# Altium PCB Seets_controller.PcbDoc
Units mm, origin at the board's own origin, x right, y up, seen from the top; angles counter-clockwise.
Board outline 152.4 x 101.6 mm, 2 copper layers (Top Layer, Bottom Layer); 41 components, 33 nets, 143 pads, 32 vias.
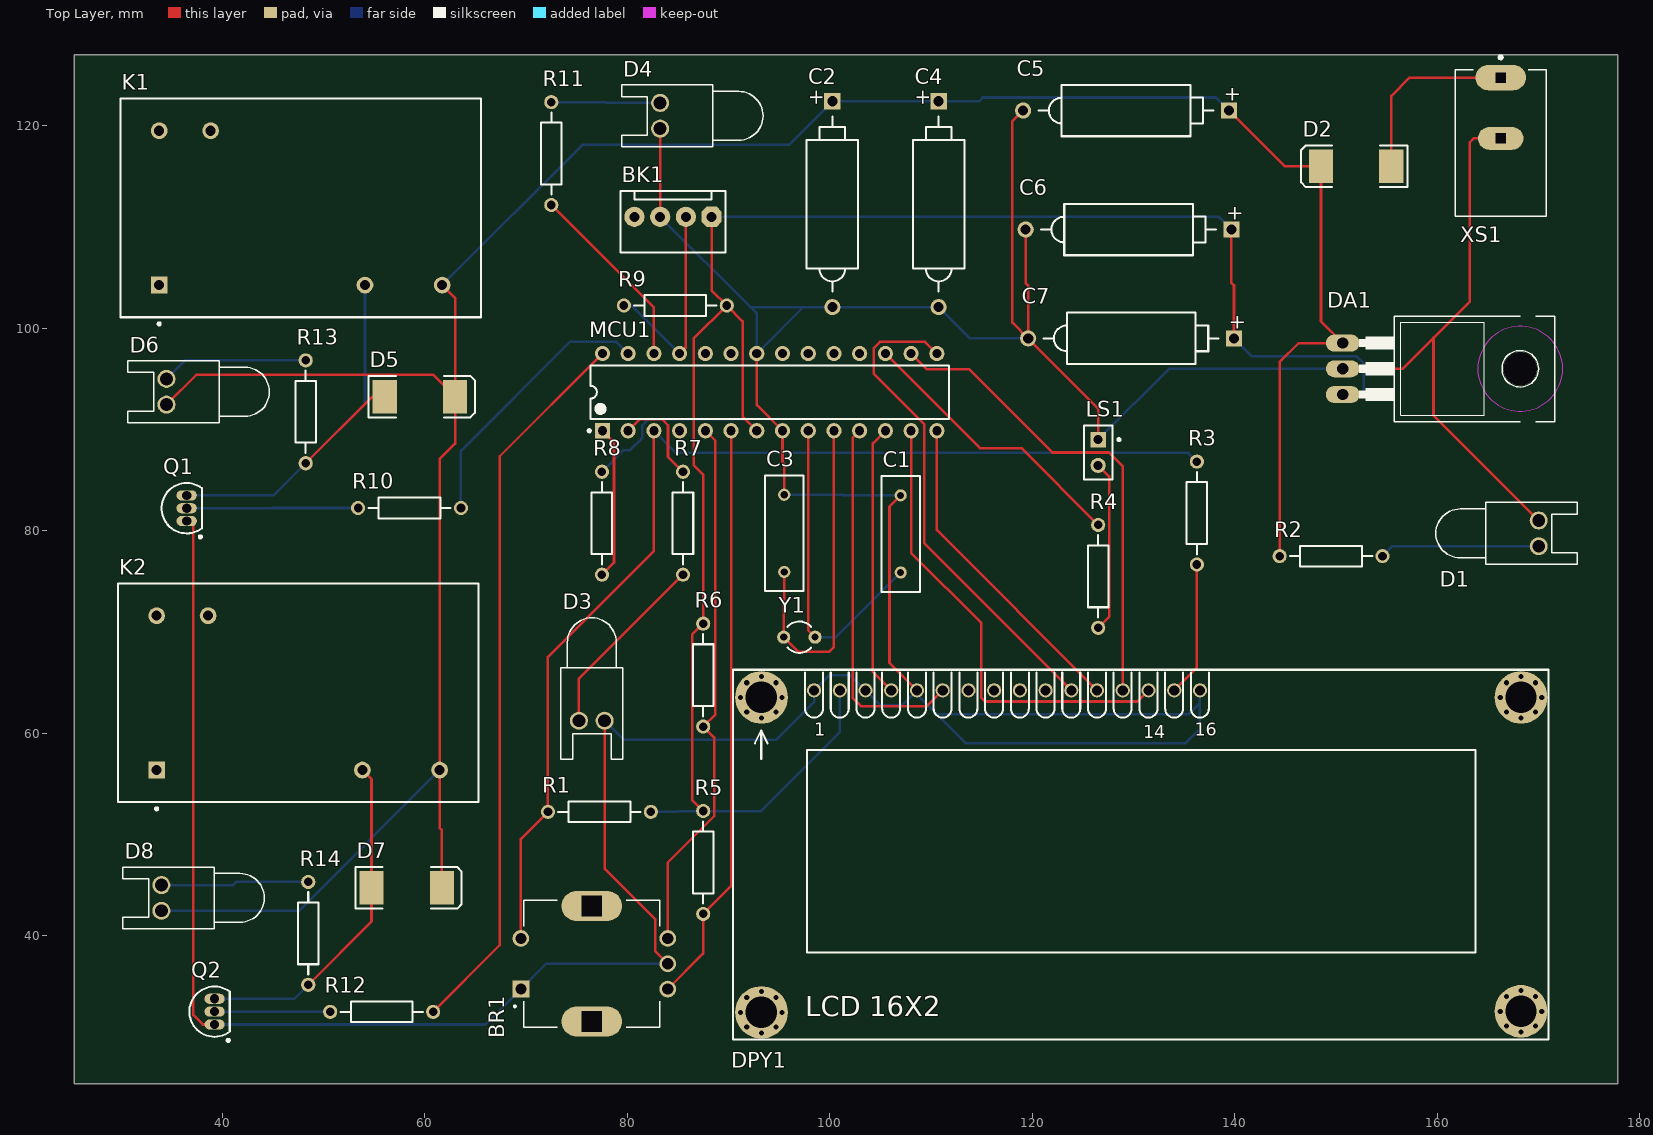
[diagram p0: Top Layer view]
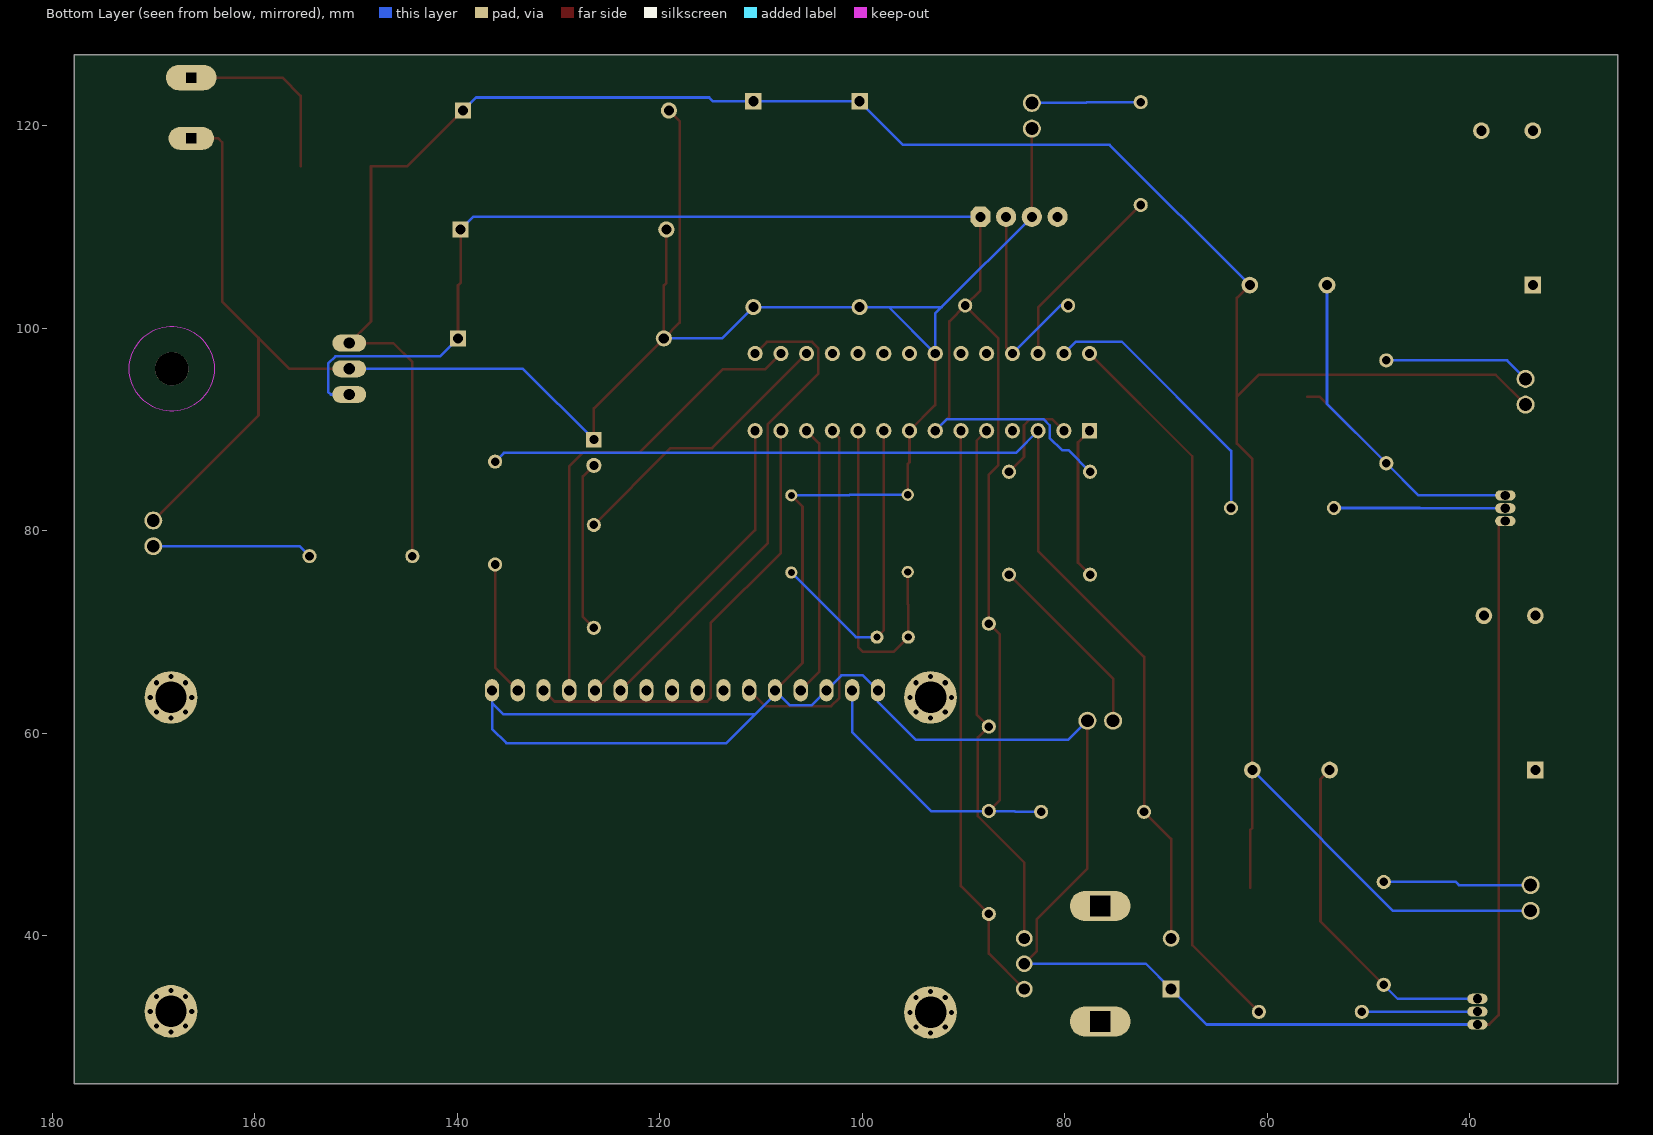
[diagram p1: Bottom Layer view, seen from below]

## Layer stack, top to bottom
Top Solder: solder mask 0.0102, Solder Resist, Dk 3.5
Top Layer: signal copper 0.0356
Dielectric 1: dielectric 0.32, FR-4, Dk 4.8
Bottom Layer: signal copper 0.0356
Bottom Solder: solder mask 0.0102, Solder Resist, Dk 3.5

## Board outline
25.4,25.4 177.8,25.4 177.8,127 25.4,127

## Design rules (kind name [scope] priority, off if disabled: settings)
Clearance [All] p1: gap=0.254 ignorepadtopadclearanceinfootprint=FALSE except(0: Arc-Hole Track-Hole SMDPad-Hole THPad-Hole Via-Hole Fill-Hole Poly-Hole Region-Hole Text-Hole)
PolygonConnect [All] p1: connectstyle=Relief reliefconductorwidth=0.254 reliefentries=4 polygonreliefangle="90 Angle" airgapwidth=0.254
RoutingVias [All] p1: holewidth=0.711 width=1.27 viastyle="Through Hole" minholewidth=0.711 minwidth=1.27 maxholewidth=0.711 maxwidth=1.27
SolderMaskExpansion [All] p1: expansion=0.102
Width [All] p1: maxlimit=0.254 minlimit=0.254 preferedwidth=0.254
30 further rules are at their usual default settings.

## Components (designator, comment, footprint, x,y, rotation, side; value= is the part's Value field where it differs from the comment)
BK1 "" WF_4 84.52,111 r180 top
BR1 "PEC11R-4215F-S0024" XDCR_PEC11R-4215F-S0024 76.5,37.25 r90 top
C1 "" RAD-0.3 107,79.69 r270 top
C2 "" POLAR0.8 100.25,112.25 r90 top
C3 "" RAD-0.3 95.5,79.75 r270 top
C4 "" POLAR0.8 110.75,112.25 r90 top
C5 "" POLAR0.8 129.25,121.5 r0 top
C6 "" POLAR0.8 129.5,109.75 r0 top
C7 "" POLAR0.8 129.75,99 r0 top
D1 "" LED-0 170,79.75 r270 top
D2 "" SMC 151.975,116 r180 top
D3 "" LED-0 76.5,61.25 r180 top
D4 "" LED-0 83.25,120.98 r90 top
D5 "" SMC 59.525,93.25 r0 top
D6 "" LED-0 34.5,93.73 r90 top
D7 "" SMC 58.225,44.75 r0 top
D8 "" LED-0 34,43.75 r90 top
DA1 "" TO220 157,96 r270 top
DPY1 "" LCDCHAR_16X2_BLU 130.75,48 r0 top
K1 "" MODULE5B 47.752,111.887 r0 top
K2 "" MODULE5B 47.5,64 r0 top
LS1 "" PIN2 126.5,89 r270 top
MCU1 "ATmega8-16PU" 28P3 94.06,93.69 r90 top
Q1 "" TO-92A 36.5,82.23 r0 top
Q2 "" TO-92A 39.25,32.52 r0 top
R1 "" AXIAL-0.4 77.25,52.25 r180 top
R2 "" AXIAL-0.4 149.5,77.5 r0 top
R3 "" AXIAL-0.4 136.25,81.75 r90 top
R4 "" AXIAL-0.4 126.5,75.5 r90 top
R5 "" AXIAL-0.4 87.5,47.25 r90 top
R6 "" AXIAL-0.4 87.5,65.75 r90 top
R7 "" AXIAL-0.4 85.5,80.75 r270 top
R8 "" AXIAL-0.4 77.5,80.75 r90 top
R9 "" AXIAL-0.4 84.75,102.25 r0 top
R10 "" AXIAL-0.4 58.5,82.25 r0 top
R11 "" AXIAL-0.4 72.5,117.25 r90 top
R12 "" AXIAL-0.4 55.75,32.5 r0 top
R13 "" AXIAL-0.4 48.25,91.75 r90 top
R14 "" AXIAL-0.4 48.5,40.25 r90 top
XS1 "Power_connector" CUI_PJ-037AH 166.25,124.75 r270 top
Y1 "" R38 97,69.5 r270 top

## Footprints (in the part's own frame and the unit in brackets; to place one, negate y for a bottom-side part, rotate by r counter-clockwise, add the part's x,y. Pads: shape width x height; smd on the part's side, far side on the other; paste and mask are expansions set on the pad)
28P3 [mm] "DIP, 28-Leads, Row Spacing 7.62mm, Pitch 2.54mm, Body 34.67x7.3mm"
  rect 1.5x1.5 hole 0.9: 1(-3.81,16.51)
  round 1.5 hole 0.9: 2(-3.81,13.97) 3(-3.81,11.43) 4(-3.81,8.89) 5(-3.81,6.35) 6(-3.81,3.81) 7(-3.81,1.27) 8(-3.81,-1.27) 9(-3.81,-3.81) 10(-3.81,-6.35) 11(-3.81,-8.89) 12(-3.81,-11.43) 13(-3.81,-13.97) 14(-3.81,-16.51) 15(3.81,-16.51) 16(3.81,-13.97) 17(3.81,-11.43) 18(3.81,-8.89) 19(3.81,-6.35) 20(3.81,-3.81) 21(3.81,-1.27) 22(3.81,1.27) 23(3.81,3.81) 24(3.81,6.35) 25(3.81,8.89) 26(3.81,11.43) 27(3.81,13.97) 28(3.81,16.51)
  silkscreen extent -3.93,-17.7 2.65,17.93, body extent -3.6,-17.65 3.6,17.65, height 4.58
AXIAL-0.4 [mm] "Axial Device, Thru-Hole; 2 Leads; 0.4 in Pin Spacing"
  round 1.4 hole 0.85: 1(-5.08,0) 2(5.08,0)
  silkscreen extent -4.06,-1.02 4.06,1.02
CUI_PJ-037AH [mm]
  oval 2.5x5 hole 1 square: 1(0,0)
  oval 2.25x4.5 hole 1 square: 2(6,0)
  silkscreen extent -2.15,-4.5 13.7,4.5, body extent -0.8,-4.5 13.7,4.5, height 11
LCDCHAR_16X2_BLU [mm] "LCD Characters Display, 2linesX16char, Blue, header1x16"
  round 1.4 / inner round 1.4 / far side oval 1.4x2.2 hole 1: 1(-32.3,16.25) 2(-29.76,16.25) 3(-27.22,16.25) 4(-24.68,16.25) 5(-22.14,16.25) 6(-19.6,16.25) 7(-17.06,16.25) 8(-14.52,16.25) 9(-11.98,16.25) 10(-9.44,16.25) 11(-6.9,16.25) 12(-4.36,16.25) 13(-1.82,16.25) 14(0.72,16.25) 15(3.26,16.25) 16(5.8,16.25)
  round 5.2 hole 3.1: MH1(-37.5,15.55) MH2(-37.5,-15.55) MH3(37.5,-15.45) MH4(37.5,15.55)
  silkscreen extent -40.29,-18.22 40.21,18.28, body extent -40,-18 40,18, height 24.8
LED-0 [mil] "LED; 2 Leads"
  round 70 hole 50: 1(50,0) 2(-50,0)
  silkscreen extent -120,-400 120,150
MODULE5B [mm] "DIP; 5 Round Pins; Row Space 15.24 mm; Pitch 2.54 mm"
  rect 1.65x1.65 hole 1: 1(-13.97,-7.62)
  round 1.65 hole 1: 2(-13.97,7.62) 3(-8.89,7.62) 4(13.97,-7.62) 5(6.35,-7.62)
  silkscreen extent -17.8,-11.57 17.8,10.8, body extent -17.8,-10.8 17.8,10.8, height 14
PIN2 [mm] "Photosensitive Diode; 2 Leads"
  rect 1.5x1.5 hole 0.9: 1(0,0)
  round 1.5 hole 0.9: 2(2.54,0)
  silkscreen extent -1.4,-1.4 3.94,2.18
POLAR0.8 [mm] "Polarized Capacitor; 2 Leads"
  rect 1.6x1.6 hole 1: 1(10.16,0)
  round 1.6 hole 1: 2(-10.16,0)
  silkscreen extent -8.64,-2.54 8.64,2.54
R38 [mm] "Crystal, Thru-Hole; 2 Leads; Body 3.1 x 8.2 mm (Dia.xH)"
  round 1.3 hole 0.7: 1(0,1.55) 2(0,-1.55)
  silkscreen extent -1.55,-1.19 1.55,1.17
RAD-0.3 [mm] "Radial Cap, Thru-Hole; 2 Leads; 0.3 in Pin Spacing"
  round 1.2 hole 0.7: 1(-3.81,0) 2(3.81,0)
  silkscreen extent -5.72,-1.9 5.71,1.91
SMC [mm] "DO-214-AB/SMC; 2 C-Bend Leads; Body 7.9 x 5.9 mm, inc. leads (LxW)"
  rect 2.4x3.3 smd: 1(-3.475,0) 2(3.475,0)
  silkscreen extent -5.07,-2.05 5.43,2.05
TO220 [mil]
  oval 66x132 hole 44: 1(-100,-250) 2(0,-250) 3(100,-250)
  round 130 hole 130 unplated: ""(0,440)
  Keep-Out Layer circle w0: c0,440 r165
  Keep-Out Layer circle w0: c0,440 r165
  silkscreen extent -205,-185 205,575
TO-92A [mm] "TO, Flat Index; 3 In-Line, Axial Leads; Body Dia. 4.5mm; Leads 0.51 x 0.48 mm (max)"
  oval 2x1 hole 0.9: 1(0,-1.27) 2(0,0) 3(0,1.27)
  silkscreen extent -2.48,-2.95 1.5,2.48, body extent -2.48,-2.5 1.5,2.5, height 6.86
WF_4 [mm] "DS1070  WF, Cvilux CI31 pitch 2.54mm"
  oct 2x2 hole 1: 1(-3.81,0)
  round 2 hole 1: 2(-1.27,0) 3(1.27,0) 4(3.81,0)
  silkscreen extent -5.2,-2.55 5.2,3.5, body extent -5.08,-2.4 5.08,3.4, height 11.56
XDCR_PEC11R-4215F-S0024 [mm]
  rect 1.65x1.65 hole 1.1: 1(-2.5,7)
  round 1.65 hole 1.1: 2(2.5,7) A(-2.5,-7.5) B(2.5,-7.5) COM(0,-7.5)
  oval 3x6 hole 2 square: S1(-5.7,0) S2(5.7,0)
  silkscreen extent -6.25,-6.7 6.25,7.7

## Part data
BK1: library part HUM_AM2301, "Sensor, Humidity+Temp, Digital, Capacitive", PARAM2=PARAM2
BR1: "Incremental Encoder, 12 Mm, Contact Rating 10 Ma - 5 Vdc", Package=None, Availability=Unavailable, MP=PEC11R-4215F-S0024, PRICE=None
C1 C3: library part Cap, "Capacitor", LatestRevisionDate=17-Jul-2002, LatestRevisionNote="Re-released for DXP Platform.", PackageDescription="Radial Cap, Thru-Hole; 2 Leads; 0.3 in Pin Spacing", PackageReference=RAD-0.3, Published=8-Jun-2000, Publisher="Altium Limited"
C2 C4 C5 C6 C7: library part "Cap Pol2", "Polarized Capacitor (Axial)", LatestRevisionDate=17-Jul-2002, LatestRevisionNote="Re-released for DXP Platform.", PackageDescription="Polarized Capacitor; 2 Leads", PackageReference=POLAR0.8, Published=8-Jun-2000, Publisher="Altium Limited"
D1 D3 D4 D6 D8: library part LED0, "Typical INFRARED GaAs LED", LatestRevisionDate=08-Jul-2005, LatestRevisionNote="Mech Layer 1 removed.", PackageDescription="LED; 2 Leads", PackageReference=LED-0, Published=8-Jun-2000, Publisher="Altium Limited"
D2 D5 D7: library part Diode, "Default Diode", Code_JEDEC=DO-214-AB, LatestRevisionDate=17-Jul-2002, LatestRevisionNote="Re-released for DXP Platform.", PackageDescription="DO-214-AB/SMC; 2 C-Bend Leads; Body 7.9 x 5.9 mm, inc. leads (LxW)", PackageReference=SMC, PackageVersion=Sep-1996, Published=8-Jun-2000, Publisher="Altium Limited"
DA1: library part LM7805, "IC REG LIN 5V 1A"
DPY1: library part LCDCHAR_16X2_BLU, "LCD Character Disp, 16X2", MANF=Newhaven, MANF_P#=NHD-0216K3Z-NSW-BBW-V3, PARAM="2 lines x 16 characters", PARAM2="Blue back, White, 5V"
K1 K2: library part Relay-SPDT, "Single-Pole Dual-Throw Relay", LatestRevisionDate=17-Jul-2002, LatestRevisionNote="Re-released for DXP Platform.", PackageReference=MODULE5B, Published=24-Mar-1999, Publisher="Altium Limited"
LS1: library part Speaker, "Loudspeaker", LatestRevisionDate=17-Jul-2002, LatestRevisionNote="Re-released for DXP Platform.", PackageReference=PIN2, Published=24-Mar-1999, Publisher="Altium Limited"
MCU1: library part CMP-0095-00372-1, "8-bit AVR Microcontroller, 4.5-5.5V, 16MHz, 8KB Flash, 512 Bytes EEPROM, 1KB SRAM, 28-pin PDIP, Industrial Grade (-40癈 to 85癈)", ComponentLink1Description="Manufacturer URL", ComponentLink1URL=http://www.atmel.com/, ComponentLink2Description=ATmega8(L), ComponentLink2URL=http://www.atmel.com/dyn/resources/prod_documents/doc2486.pdf, ComponentLink3Description="ATmega8(L) Summary", ComponentLink3URL=http://www.atmel.com/dyn/resources/prod_documents/2486S.pdf, DatasheetVersion="revZ, Feb-2011", PackageDescription="28-lead (0.300\"/7.62mm Wide) Plastic Dual Inline Package (PDIP)", PackageReference=28P3, PackageVersion="revB, Sep-2001"
Q1 Q2: library part 2N3904, "NPN General Purpose Amplifier", ComponentLink1Description="Manufacturer Link", ComponentLink1URL=http://www.fairchildsemi.com/, ComponentLink2Description=Datasheet, ComponentLink2URL=http://www.fairchildsemi.com/ds/2N%2F2N3904.pdf, DatasheetVersion=1997, LatestRevisionDate=15-Jan-2003, LatestRevisionNote="PCB Footprint 'BCY-W3/D4.7' replaced", PackageDescription="TO, Flat Index; 3 In-Line, Axial Leads; Body Dia. 4.5mm; Leads 0.51 x 0.48 mm (max)", PackageReference=TO-92A, PackageVersion=Sep-1998, Published=8-Jun-2000, Publisher="Altium Limited"
R1 R2 R3 R4 R5 R6 R7 R8 R9 R10 R11 R12 R13 R14: library part Res2, "Resistor", LatestRevisionDate=17-Jul-2002, LatestRevisionNote="Re-released for DXP Platform.", PackageDescription="Axial Device, Thru-Hole; 2 Leads; 0.4 in Pin Spacing", PackageReference=AXIAL-0.4, Published=8-Jun-2000, Publisher="Altium Limited"
Y1: library part XTAL, "Crystal Oscillator", LatestRevisionDate=17-Jul-2002, LatestRevisionNote="Re-released for DXP Platform.", PackageDescription="Crystal, Thru-Hole; 2 Leads; Body 3.1 x 8.2 mm (Dia.xH)", PackageReference=R38, Published=8-Jun-2000, Publisher="Altium Limited"

## Via types
v1: diameter 1, hole 0.5, Top Layer to Bottom Layer, 32 vias

## Nets (pads, with @x,y where several pads share a name; then routed paths per layer and width w, separated by ;. In a path a pad name is that pad's centre, name@x,y a point inside that pad or via, vN(x,y) a via of type N, cw(c..) or ccw(c..) an arc to the next point about the centre after c; other vN are vias at no path point)
+5: BK1.1 C6.1 C7.1 DA1.3 DPY1.2 MCU1.7 R1.1 R5.2 R6.2 R8.2 R9.2 | length 201.8
  Top Layer w0.254: R5.2 86.411,53.419 86.411,69.741 R6.2 87.5,85.55 86.563,86.487 86.563,98.983 R9.2 ; BK1.1 88.33,103.75 R9.2 ; MCU1.7 91.389,91.281 91.389,100.691 R9.2 ; C6.1 139.66,104.492 139.91,104.242 C7.1
  Bottom Layer w0.254: R8.2 79.63,87.96 80.264,87.96 81.483,89.179 81.483,90.424 82.093,91.034 91.636,91.034 MCU1.7 ; R1.1 84.861,52.25 84.941,52.33 R5.2 93.199,52.33 100.99,60.121 DPY1.2 ; BK1.1 138.41,111 C6.1 ; C7.1 141.679,97.231 152.019,97.231 152.73,96.52 152.73,93.726 152.464,93.46 DA1.3
+12: C2.1 C4.1 C5.1 D2.2 D5.2 D6.2 D7.2 D8.2 DA1.1 K1.4 K2.4 R2.1 | length 266.4
  Top Layer w0.254: D6.2 37.442,95.402 60.848,95.402 D5.2 ; D7.2 61.7,50.444 61.47,50.674 K2.4 61.47,87.091 63,88.621 D5.2 ; K1.4 63,102.989 D5.2 ; C5.1 144.91,116 D2.2 148.5,100.69 DA1.1 146.304,98.54 144.42,96.656 R2.1
  Bottom Layer w0.254: D8.2 47.57,42.48 K2.4 ; K1.4 75.565,118.11 95.95,118.11 C2.1 C4.1 114.732,122.41 115.105,122.784 138.126,122.784 C5.1
+12V: D2.1 XS1.1 | length 18.5
  Top Layer w0.254: D2.1 155.45,122.936 157.264,124.75 XS1.1
Anod: DPY1.15 R3.1 | length 13.3
  Top Layer w0.254: DPY1.15 136.25,66.49 R3.1
D7: DPY1.14 MCU1.13 | length 46.4
  Top Layer w0.254: MCU1.13 108.03,77.822 114.96,70.891 114.96,63.5 115.316,63.144 130.364,63.144 DPY1.14
E: DPY1.6 MCU1.11 | length 36.6
  Top Layer w0.254: MCU1.11 102.25,89.18 102.25,63.5 103.063,62.687 109.587,62.687 DPY1.6
GND: BK1.3 BR1.1 BR1.COM C1.1 C2.2 C3.1 C4.2 C5.2 C6.2 C7.2 D1.2 D3.2 D4.2 DA1.2 DPY1.1 DPY1.3 DPY1.5 DPY1.16 LS1.1 MCU1.8 MCU1.22 Q1.1 Q2.1 XS1.2 | length 463.4
  Top Layer w0.254: Q1.1 37.16,80.96 37.16,32.19 38.1,31.25 Q2.1 ; D3.2 77.77,46.639 82.779,41.631 82.779,38.471 BR1.COM ; BK1.3 D4.2 ; MCU1.22 92.79,92.42 MCU1.8 95.33,86.784 95.5,86.614 C3.1 ; C1.1 105.893,82.393 105.893,66.967 DPY1.5 ; C5.2 118.034,120.444 118.034,100.556 C7.2 ; C6.2 119.34,104.492 119.59,104.242 C7.2 ; LS1.1 126.5,92.09 C7.2 ; DA1.2 156.566,96 159.614,99.048 ; XS1.2 163.576,118.75 163.195,118.369 163.195,102.629 159.614,99.048 ; D1.2 159.614,91.406 159.614,99.048
  Bottom Layer w0.254: Q2.1 66,31.25 BR1.1 72,37.25 BR1.COM ; D3.2 79.66,59.36 94.691,59.36 98.45,63.119 DPY1.1 99.935,65.735 102.045,65.735 DPY1.3 105.017,62.763 107.123,62.763 DPY1.5 108.61,63.83 110.567,61.874 ; BK1.3 92.16,102.09 ; C3.1 101.219,83.56 101.279,83.5 C1.1 ; C7.2 113.84,99 C4.2 C2.2 97.38,102.09 ; LS1.1 133.5,96 DA1.2 ; DPY1.16 136.55,62.992 ; 92.16,102.09 97.38,102.09 ; 92.16,102.09 92.79,101.46 MCU1.22 97.38,102.09 ; 110.567,61.874 113.411,59.03 135.128,59.03 136.55,60.452 136.55,62.992 ; 110.567,61.874 135.432,61.874 136.55,62.992
NetBK1_2: BK1.2 MCU1.25 R9.1 | length 21.2
  Top Layer w0.254: MCU1.25 85.79,98.12 BK1.2
  Bottom Layer w0.254: R9.1 80.42,102.25 MCU1.25
NetBR1_2: BR1.2 MCU1.3 R1.2 R3.2 | length 110.5
  Top Layer w0.254: BR1.2 69.5,49.58 R1.2 72.17,67.547 82.63,78.007 MCU1.3
  Bottom Layer w0.254: MCU1.3 84.804,87.706 135.374,87.706 R3.2
NetBR1_A: BR1.A MCU1.6 R5.1 | length 57.7
  Top Layer w0.254: BR1.A 87.5,38.25 R5.1 90.25,44.92 MCU1.6
NetBR1_B: BR1.B MCU1.5 R6.1 | length 53.4
  Top Layer w0.254: BR1.B 84,47.235 88.581,51.816 88.581,59.589 R6.1 88.697,61.867 88.697,88.893 MCU1.5
NetC1_2: C1.2 MCU1.9 Y1.1 | length 31.8
  Top Layer w0.254: MCU1.9 97.87,70.18 Y1.1
  Bottom Layer w0.254: Y1.1 100.62,69.5 C1.2
NetC3_2: C3.2 MCU1.10 Y1.2 | length 33.6
  Top Layer w0.254: C3.2 95.5,72.745 95.45,72.695 Y1.2 96.903,68.047 99.924,68.047 100.41,68.533 MCU1.10
NetD1_1: D1.1 R2.2 | length 15.8
  Bottom Layer w0.254: R2.2 155.56,78.48 D1.1
NetD3_1: D3.1 R7.2 | length 18.7
  Top Layer w0.254: D3.1 75.23,65.4 R7.2
NetD4_1: D4.1 R11.2 | length 10.8
  Bottom Layer w0.254: R11.2 77.826,122.33 77.906,122.25 D4.1
NetD5_1: D5.1 K1.5 Q1.3 R13.1 | length 43.6
  Top Layer w0.254: R13.1 54.83,93.25 D5.1
  Bottom Layer w0.254: Q1.3 45.08,83.5 R13.1 54.102,92.522 K1.5
NetD6_1: D6.1 R13.2 | length 14.5
  Bottom Layer w0.254: D6.1 36.33,96.83 R13.2
NetD7_1: D7.1 K2.5 Q2.3 R14.1 | length 34
  Top Layer w0.254: R14.1 54.75,41.42 D7.1 54.75,55.48 K2.5
  Bottom Layer w0.254: Q2.3 47.12,33.79 R14.1
NetD8_1: D8.1 R14.2 | length 14.6
  Bottom Layer w0.254: D8.1 41.072,45.02 41.382,45.33 R14.2
NetDPY1_11: DPY1.11 MCU1.15 | length 48.8
  Top Layer w0.254: MCU1.15 109.416,98.654 104.953,98.654 104.343,98.044 104.343,95.504 109.322,90.526 109.322,78.778 DPY1.11
NetDPY1_12: DPY1.12 MCU1.14 | length 32.2
  Top Layer w0.254: MCU1.14 110.57,80.07 DPY1.12
NetDPY1_13: DPY1.13 MCU1.16 | length 47.6
  Top Layer w0.254: MCU1.16 109.569,95.961 113.741,95.961 121.971,87.732 127.558,87.732 128.93,86.36 DPY1.13
NetLS1_2: LS1.2 R4.1 | length 16.9
  Top Layer w0.254: R4.1 127.584,71.504 127.584,85.376 LS1.2
NetMCU1_1: MCU1.1 R8.1 | length 15.2
  Top Layer w0.254: R8.1 78.689,76.859 78.689,88.741 MCU1.1
NetMCU1_2: MCU1.2 R7.1 | length 9.9
  Top Layer w0.254: MCU1.2 81.244,91.034 83.414,91.034 84.023,90.424 84.023,87.307 R7.1
NetMCU1_17: MCU1.17 R4.2 | length 28
  Top Layer w0.254: MCU1.17 114.818,88.172 118.908,88.172 R4.2
NetMCU1_26: MCU1.26 R11.1 | length 18.9
  Top Layer w0.254: R11.1 82.63,102.04 MCU1.26
NetMCU1_27: MCU1.27 R10.2 | length 27.1
  Bottom Layer w0.254: R10.2 63.58,87.888 74.371,98.679 78.911,98.679 MCU1.27
NetMCU1_28: MCU1.28 R12.2 | length 71.9
  Top Layer w0.254: R12.2 67.412,39.082 67.412,87.362 MCU1.28
NetQ1_2: Q1.2 R10.1 | length 16.9
  Bottom Layer w0.254: Q1.2 44.933,82.23 44.953,82.25 R10.1
NetQ2_2: Q2.2 R12.1 | length 11.4
  Bottom Layer w0.254: Q2.2 44.933,32.52 44.953,32.5 R12.1
RS: DPY1.4 MCU1.12 | length 26.9
  Top Layer w0.254: MCU1.12 104.25,88.64 104.25,66.07 DPY1.4
pads on no net: BK1.4 BR1.S1 BR1.S2 DA1. DPY1.7 DPY1.8 DPY1.9 DPY1.10 DPY1.MH1 DPY1.MH2 DPY1.MH3 DPY1.MH4 K1.1 K1.2 K1.3 K2.1 K2.2 K2.3 MCU1.4 MCU1.18 MCU1.19 MCU1.20 MCU1.21 MCU1.23 MCU1.24
copper on no net:
  other v1: 93.25,30.4 168.25,30.5 91.8,31 94.699,31 166.8,31.1 169.699,31.1 91.2,32.45 95.3,32.45 166.2,32.55 170.3,32.55 91.8,33.899 94.699,33.899 166.8,33.999 169.699,33.999 93.25,34.5 168.25,34.6 93.25,61.5 168.25,61.5 91.8,62.1 94.699,62.1 166.8,62.1 169.699,62.1 91.2,63.55 95.3,63.55 166.2,63.55 170.3,63.55 91.8,64.999 94.699,64.999 166.8,64.999 169.699,64.999 93.25,65.6 168.25,65.6

## Text inside footprints (layer, text, board x,y; h text height)
C2: Top Overlay "+" at 99.3,121.902 h1.5 r90
C4: Top Overlay "+" at 109.8,121.902 h1.5 r90
C5: Top Overlay "+" at 138.902,122.45 h1.5
C6: Top Overlay "+" at 139.152,110.7 h1.5
C7: Top Overlay "+" at 139.402,99.95 h1.5
DA1: Mechanical 13 "3" at 157,94.095 h1.27 r270; Mechanical 13 "2" at 157,96.636 h1.27 r270; Mechanical 13 "1" at 157,99.181 h1.27 r270
DPY1: Top Overlay "LCD 16X2" at 97.568,32.054 h2; Top Overlay "16" at 136.034,59.783 h1.27; Top Overlay "1" at 98.442,59.783 h1.27; Top Overlay "14" at 130.954,59.529 h1.27